# Altium PCB A1.0-电源-1.1-DC-DC12V输入转5V和3.3V-24.10.16.PcbDoc
Units mm, origin at the board's own origin, x right, y up, seen from the top; angles counter-clockwise.
Board outline 27.5 x 52.5 mm, 2 copper layers (Top Layer, Bottom Layer); 17 components, 8 nets, 53 pads, 0 vias.
Unrouted connection lines stored in the file: 1.
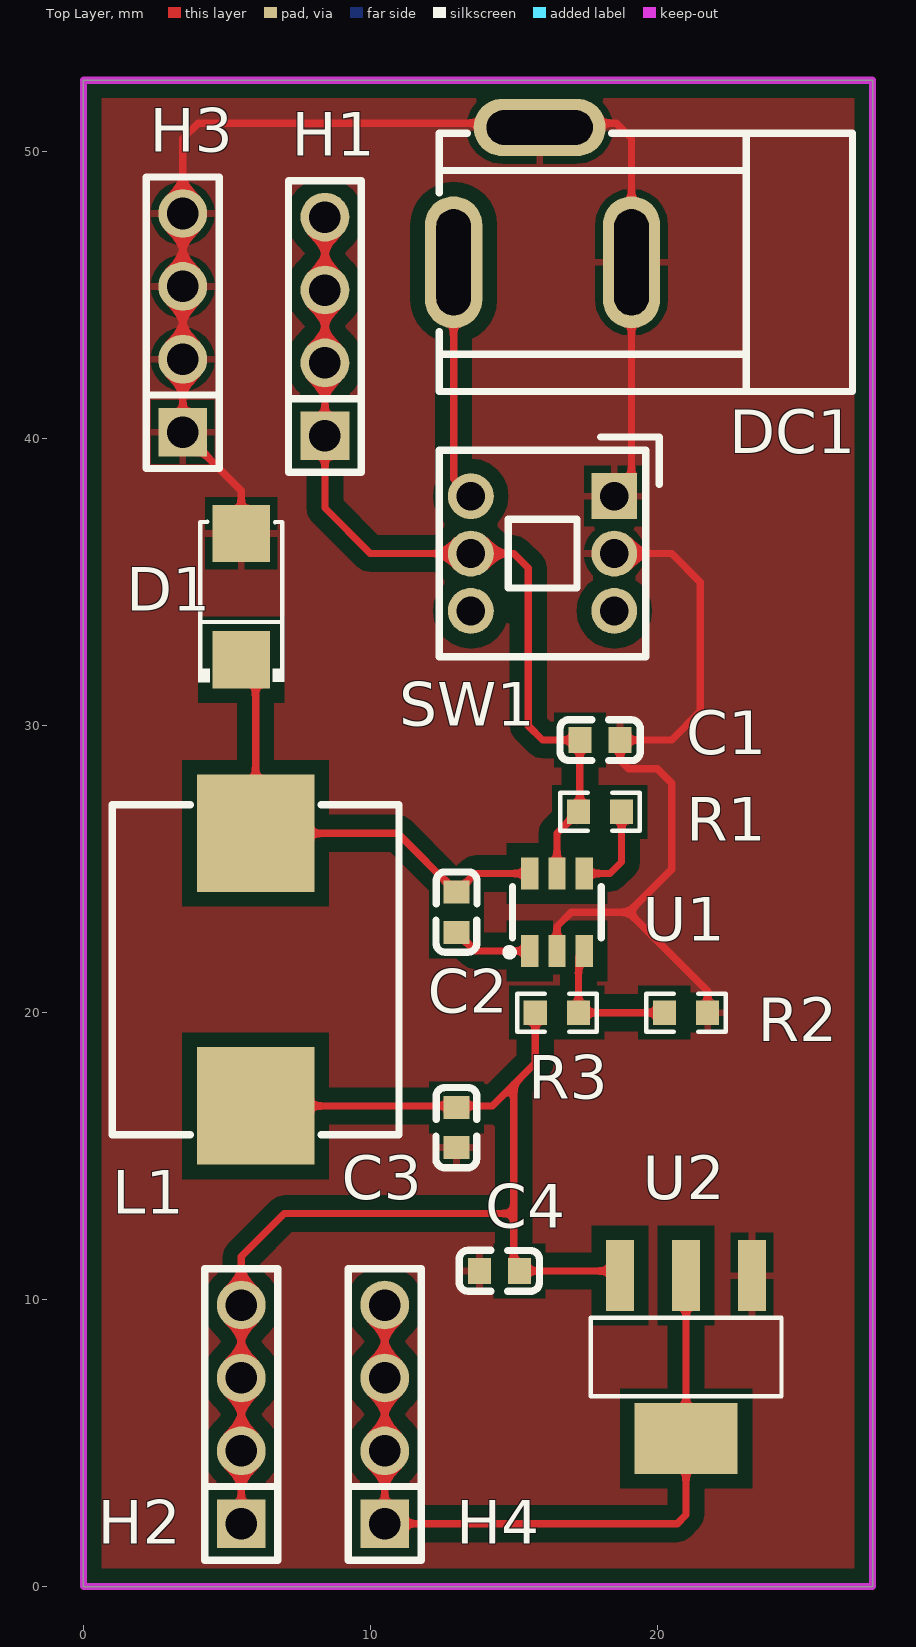
[diagram p0: Top Layer view]
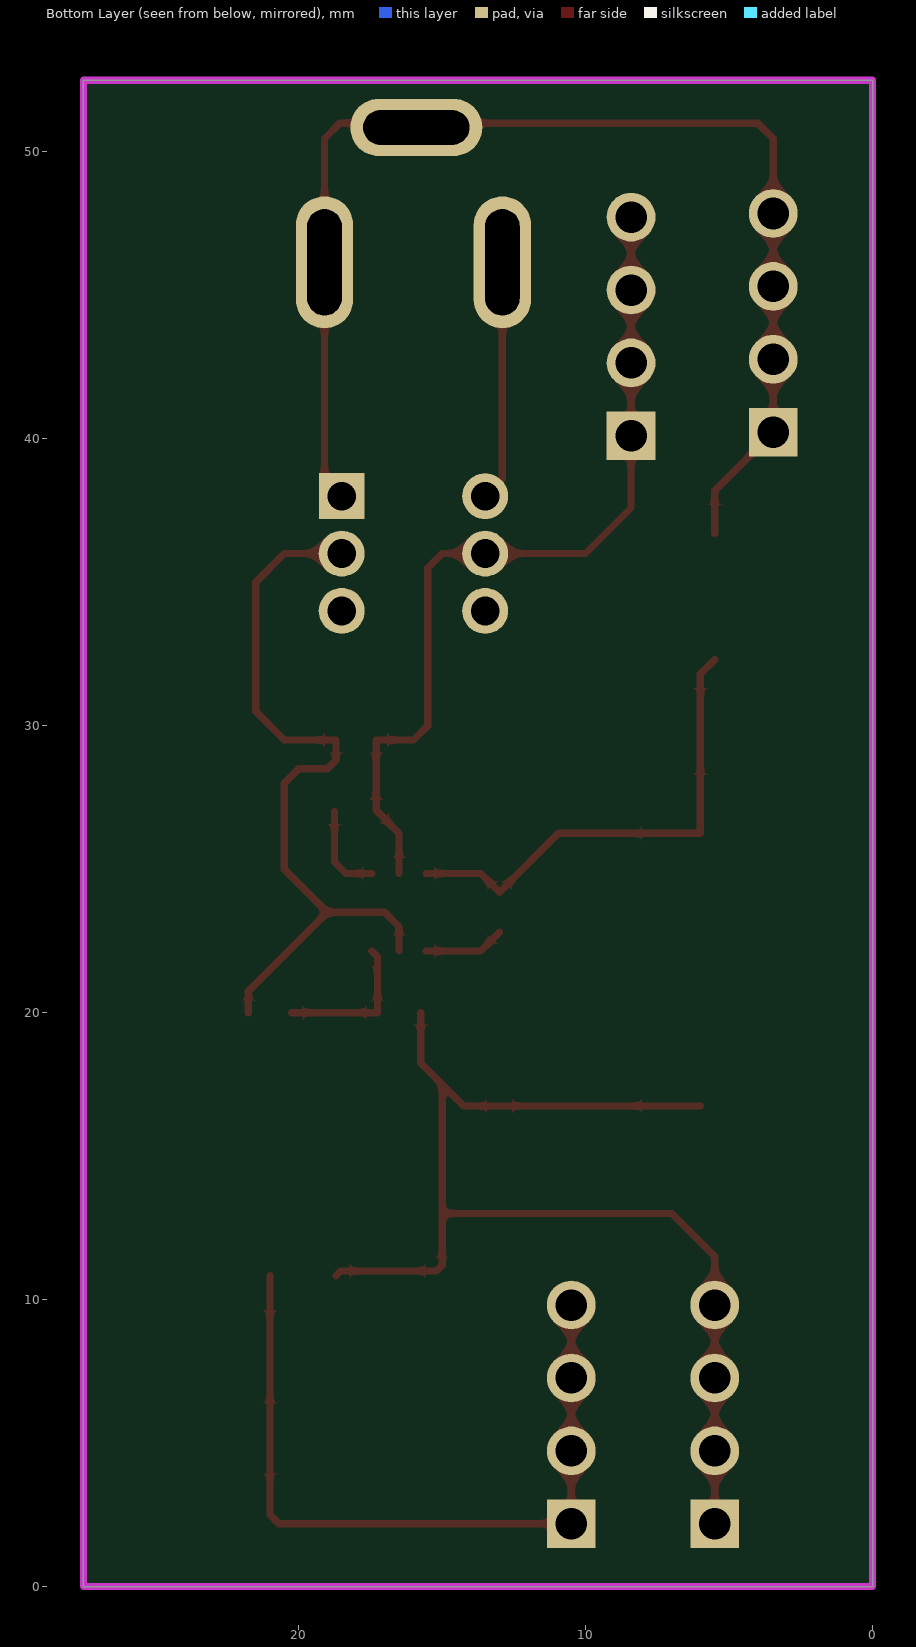
[diagram p1: Bottom Layer view, seen from below]

## Layer stack, top to bottom
Top Solder: solder mask 0.0102, Solder Resist, Dk 3.5
Top Layer: signal copper 0.0356
Dielectric 1: dielectric 0.32, FR-4, Dk 4.8
Bottom Layer: signal copper 0.0356
Bottom Solder: solder mask 0.0102, Solder Resist, Dk 3.5

## Board outline
0,0 0,52.5 27.5,52.5 27.5,0

## Design rules (kind name [scope] priority, off if disabled: settings)
Clearance Clearance_1 [InNamedPolygon('Top Layer-GND')] p1: gap=0.5
Clearance [All] p2: gap=0.254
PolygonConnect [All] p1: connectstyle=Relief reliefconductorwidth=0.254 reliefentries=4 polygonreliefangle="90 Angle" airgapwidth=0.254
RoutingVias [All] p1: holewidth=0.711 width=1.27 viastyle="Through Hole" minholewidth=0.711 minwidth=1.27 maxholewidth=0.711 maxwidth=1.27
SolderMaskExpansion [All] p1: expansion=0.102
Width [All] p1: maxlimit=0.254 minlimit=0.254 preferedwidth=0.254
30 further rules are at their usual default settings.

## Components (designator, comment, footprint, x,y, rotation, side; value= is the part's Value field where it differs from the comment)
C1 "4.7uF" C0603 18,29.5 r180 top
C2 "100nF" C0603 13,23.5 r270 top
C3 "10uF" C0603 13,16 r90 top
C4 "4.7uF" C0603 14.5,11 r0 top
D1 "SS16" SMA_L4.3-W2.6-LS5.2-RD 5.5,34.5 r90 top
DC1 "DC005" DC-IN-TH_DC005 16,48.5 r180 top
H1 "PZ254V-11-04P" HDR-TH_4P-P2.54-V-M 8.415,43.914 r90 top
H2 "PZ254V-11-04P" HDR-TH_4P-P2.54-V-M 5.5,6 r90 top
H3 "PZ254V-11-04P" HDR-TH_4P-P2.54-V-M 3.462,44.041 r90 top
H4 "PZ254V-11-04P" HDR-TH_4P-P2.54-V-M 10.5,6 r90 top
L1 "15uH" IND-SMD_L11.5-W10.0_FXL1040 6,21.5 r270 top
R1 "62kΩ" R0603 18,27 r0 top
R2 "12kΩ" R0603 21,20 r0 top
R3 "62kΩ" R0603 16.5,20 r0 top
SW1 "XKB7070-Z" SW-TH_6P-L7.0-W7.0-P2.00 16,36 r0 top
U1 "BL9366" SOT-23-6_L2.9-W1.6-P0.95-LS2.8-BR 16.5,23.5 r270 top
U2 "AMS1117-3.3V" SOT-223-4_L6.5-W3.5-P2.30-LS7.0-TR 21,8 r180 top

## Footprints (in the part's own frame and the unit in brackets; to place one, negate y for a bottom-side part, rotate by r counter-clockwise, add the part's x,y. Pads: shape width x height; smd on the part's side, far side on the other; paste and mask are expansions set on the pad)
C0603 [mm]
  rect 0.8x0.9 smd: 1(-0.7,0) 2(0.7,0)
  silkscreen extent -1.41,-0.71 1.39,0.72
DC-IN-TH_DC005 [mm]
  oval 2x4.6 hole 1.2 slot 3.7 at 90 deg: 1(3.1,2.35) 2(-3.1,2.35)
  oval 4.6x2 hole 1.2 slot 3.7 at 0 deg: 3(0.1,-2.35)
  silkscreen extent -10.8,-2.15 3.6,6.85
HDR-TH_4P-P2.54-V-M [mm]
  rect 1.7x1.7 hole 1.1: 1(-3.81,0)
  round 1.7 hole 1.1: 2(-1.27,0) 3(1.27,0) 4(3.81,0)
  silkscreen extent -5.08,-1.27 5.08,1.27
IND-SMD_L11.5-W10.0_FXL1040 [mm]
  rect 4.1x4.1 smd: 1(-4.75,0) 2(4.75,0)
  silkscreen extent -5.75,-5 5.75,5
R0603 [mm]
  rect 0.806x0.864 smd paste-100 mask+0.051: 1(-0.753,0) 2(0.753,0)
  silkscreen extent -1.39,-0.66 1.39,0.66
SMA_L4.3-W2.6-LS5.2-RD [mm]
  rect 2x2 smd: 1(-2.2,0) 2(2.2,0)
  silkscreen extent -2.98,-1.5 2.6,1.5
SOT-23-6_L2.9-W1.6-P0.95-LS2.8-BR [mm]
  rect 1.1x0.6 smd paste+0 mask+0.051: 1(1.35,-0.95) 2(1.35,0) 3(1.35,0.95) 4(-1.35,0.95) 5(-1.35,0) 6(-1.35,-0.95)
  silkscreen extent -0.9,-1.78 1.52,1.55
SOT-223-4_L6.5-W3.5-P2.30-LS7.0-TR [mm]
  rect 0.98x2.47 smd: 1(-2.3,-2.835) 2(0,-2.835) 3(2.3,-2.835)
  rect 3.6x2.47 smd: 4(0,2.835)
  silkscreen extent -3.33,-1.37 3.33,1.37
SW-TH_6P-L7.0-W7.0-P2.00 [mm]
  rect 1.6x1.6 hole 1: 1(2.5,2)
  round 1.6 hole 1: 2(2.5,0) 3(2.5,-2) 4(-2.5,2) 5(-2.5,0) 6(-2.5,-2)
  silkscreen extent -3.6,-3.6 4.06,4.06

## Part data
C1 C4: library part 0603X475K250NT
C2: library part 0603B104K500NT
C3: library part 0603X106M250NT
D1: library part SS16_C2481
L1: library part FXL1040-150-M
R1 R3: library part 0603WAF6202T5E
R2: library part 0603WAF1202T5E
U2: library part AMS1117-3.3V_C5120765

## Nets (pads, with @x,y where several pads share a name; then routed paths per layer and width w, separated by ;. In a path a pad name is that pad's centre, name@x,y a point inside that pad or via, vN(x,y) a via of type N, cw(c..) or ccw(c..) an arc to the next point about the centre after c; other vN are vias at no path point)
3.3V: H4.1 H4.2 H4.3 H4.4 U2.2 U2.4 | length 26.6
  Top Layer w0.254: H4.4 H4.3 H4.2 H4.1 20.69,2.19 21,2.5 U2.4 U2.2
5V: C3.2 C4.2 H2.1 H2.2 H2.3 H2.4 L1.2 R3.1 U2.3 | length 41.7
  Top Layer w0.254: H2.1 H2.2 H2.3 H2.4 5.5,11.5 7,13 14.998,13 ; L1.2 14.25,16.75 14.998,17.498 ; R3.1 15.747,18.247 14.998,17.498 ; U2.3 18.535,11 C4.2 14.998,11.202 14.998,13 ; 14.998,13 14.998,17.498
12V: C1.2 DC1.1 H1.1 H1.2 H1.3 H1.4 R1.1 SW1.4 SW1.5 U1.5 | length 39.5
  Top Layer w0.254: H1.4 H1.3 H1.2 H1.1 8.415,37.585 10,36 SW1.5 15,36 15.5,35.5 15.5,30 16,29.5 C1.2 17.3,27.053 R1.1 16.5,26.253 U1.5 ; DC1.1@12.9,46.65 12.9,38.6 SW1.4
GND: C1.1 C3.1 C4.1 D1.2 DC1.2 DC1.3 H3.1 H3.2 H3.3 H3.4 R2.2 SW1.1 SW1.2 U1.2 U2.1 | length 71
  Top Layer w0.254: D1.2 5.5,38.193 H3.1 H3.2 H3.3 H3.4 3.462,50.462 4,51 15.55,51 15.9,51.35 17.65,51.35 18,51 18.564,51 19.1,50.465 19.1,38.6 SW1.1 ; U1.2 16.5,23 17,23.5 19,23.5 ; SW1.2 20.5,36 21.5,35 21.5,30.5 20.5,29.5 C1.1 18.7,28.8 19,28.5 20,28.5 20.5,28 20.5,25 19,23.5 ; R2.2 21.753,20.747 19,23.5
NetC2_1: C2.1 D1.1 L1.1 U1.6 | length 16.9
  Top Layer w0.254: D1.1 6,31.8 L1.1 10.95,26.25 C2.1 13.65,24.85 U1.6
NetC2_2: C2.2 U1.1 | length 2.8
  Top Layer w0.254: C2.2 13.65,22.15 U1.1
NetR1_2: R1.2 U1.4 | length 3.2
  Top Layer w0.254: U1.4 18.35,24.85 18.753,25.253 R1.2
NetR2_1: R2.1 R3.2 U1.3 | length 5.2
  Top Layer w0.254: U1.3 17.253,21.953 R3.2 R2.1
pads on no net: SW1.3 SW1.6

## Polygon pours and split planes (outlines as drawn)
GND on Top Layer "Top Layer-GND" (solid, remove dead copper, pour order 0): 0,52.5 0,0 27.5,0 27.5,52.5 0,52.5

## Keep-outs
Keep-Out Layer:
  the board outline again, w0.254